# Altium PCB portable_inhaler_test v01 PCB.PcbDoc
Units mm, origin at the board's own origin, x right, y up, seen from the top; angles counter-clockwise.
Board outline 70 x 70 mm, 2 copper layers (Top Layer, Bottom Layer); 21 components, 16 nets, 116 pads, 0 vias.
Unrouted connection lines stored in the file: 47.
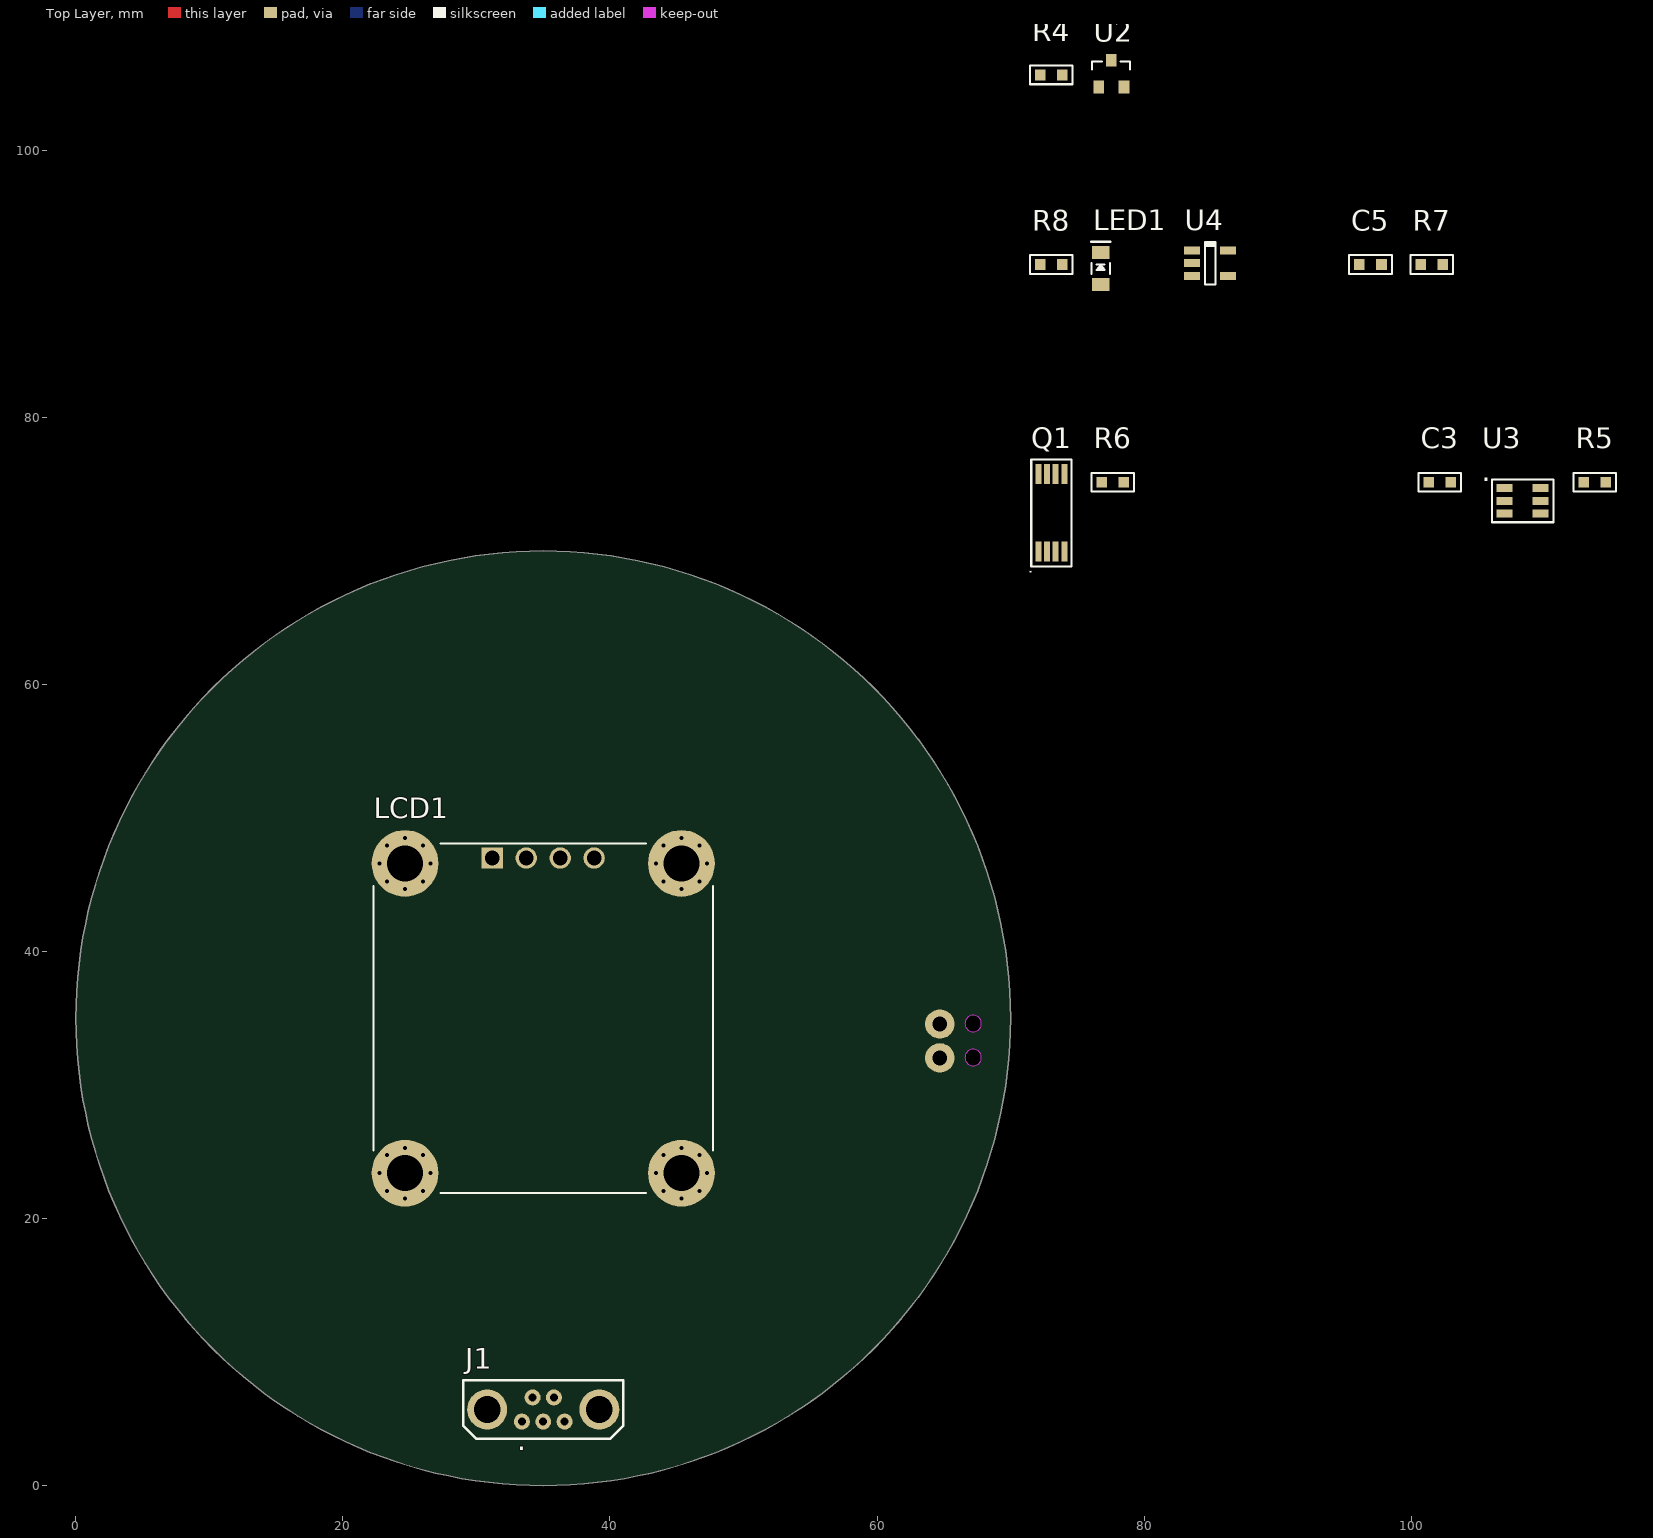
[diagram p0: Top Layer view]
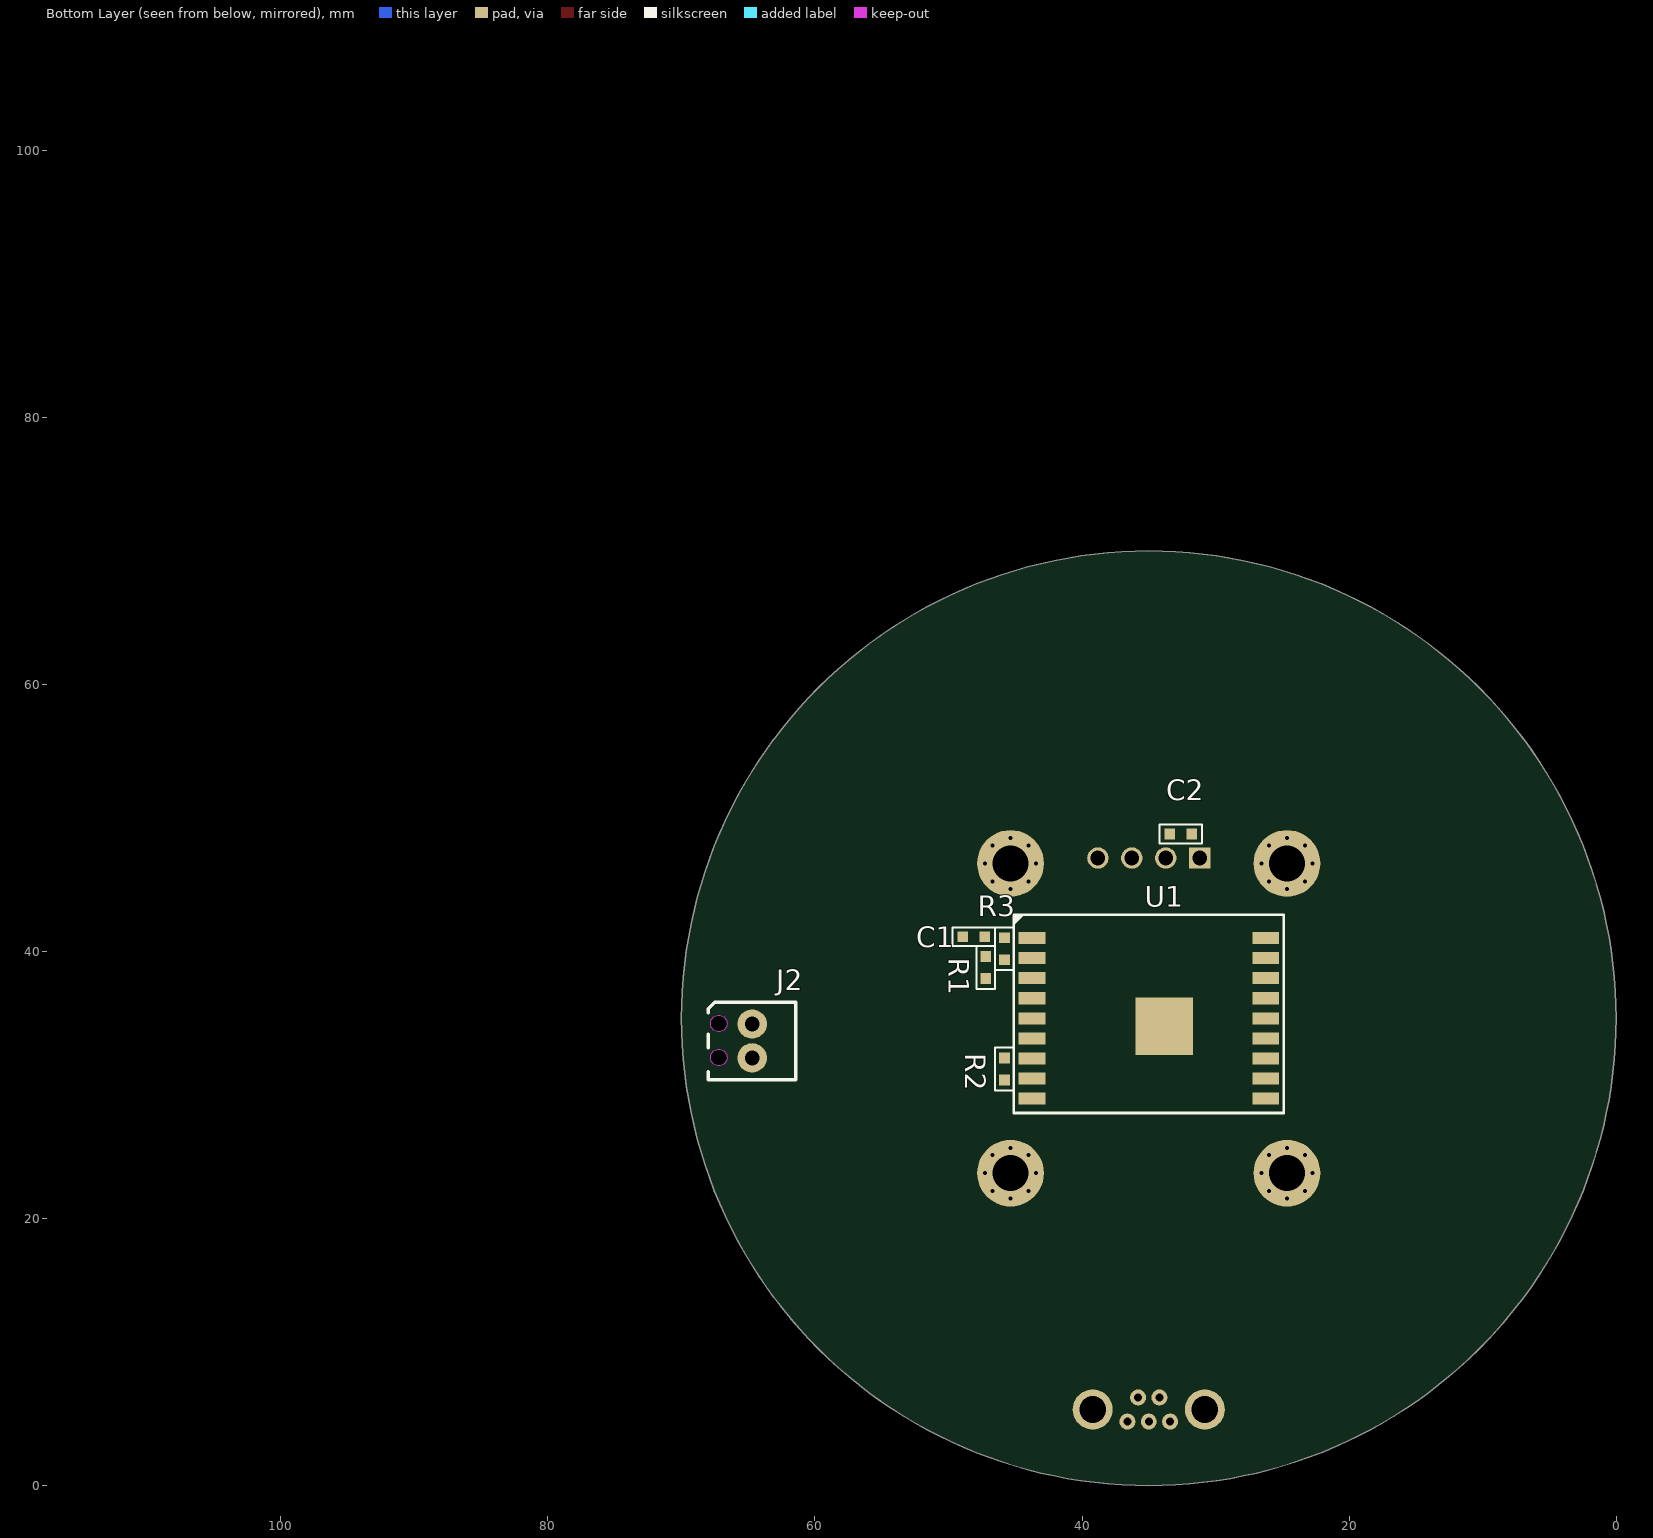
[diagram p1: Bottom Layer view, seen from below]

## Layer stack, top to bottom
Top Solder: solder mask 0.0102, Solder Resist, Dk 3.5
Top Layer: signal copper 0.0356
Dielectric 1: dielectric 0.32, FR-4, Dk 4.8
Bottom Layer: signal copper 0.0356
Bottom Solder: solder mask 0.0102, Solder Resist, Dk 3.5

## Board outline
35,0 cw(c35,35) 0,35 cw(c35,35) 35,70 cw(c35,35) 70,35 cw(c35,35)

## Design rules (kind name [scope] priority, off if disabled: settings)
Clearance [All] p1: gap=0.254 ignorepadtopadclearanceinfootprint=FALSE except(0: Arc-Hole Track-Hole SMDPad-Hole THPad-Hole Via-Hole Fill-Hole Poly-Hole Region-Hole Text-Hole)
PolygonConnect [All] p1: connectstyle=Relief reliefconductorwidth=0.254 reliefentries=4 polygonreliefangle="90 Angle" airgapwidth=0.254
RoomDefinition U_display [InComponentClass('U_display')] p1: confinementstyle=ConfineIn formatcopy=TRUE lockcomponents=FALSE outline 21.75,20.45 48.25,20.45 48.25,50.85 21.75,50.85
RoomDefinition U_MCU [InComponentClass('U_MCU')] p2: confinementstyle=ConfineIn formatcopy=TRUE lockcomponents=FALSE outline 24.45,27.45 48.65,27.45 48.65,43.75 24.45,43.75
RoutingVias [All] p1: holewidth=0.711 width=1.27 viastyle="Through Hole" minholewidth=0.711 minwidth=1.27 maxholewidth=0.711 maxwidth=1.27
SolderMaskExpansion [All] p1: expansion=0.102 istentingtop=FALSE
Width [All] p1: maxlimit=0.254 minlimit=0.254 preferedwidth=0.254
30 further rules are at their usual default settings.

## Classes and differential pairs
component class U_power: R4 U2
component class U_battery: C3 J2 Q1 R5 R6 U3
component class U_battery_charger: C5 J1 LED1 R7 R8 U4
component class U_display: C2 LCD1
component class U_MCU: C1 R1 R2 R3 U1

## Components (designator, comment, footprint, x,y, rotation, side; value= is the part's Value field where it differs from the comment)
C1 "100nF" CAP0603 48.1,41.1 r180 bottom
C2 "100nF" CAP0603 32.6,48.8 r180 bottom
C3 "100nF" CAP0603 102.15,75.15 r0 top
C5 "100nF" CAP0603 96.95,91.45 r0 top
J1 "mini-USB female" L-KLS1-229-5FC 35,5.7 r0 top
J2 "PHOENIX_1725656" PHOENIX_1725656 64.7,33.3 r0 bottom
LCD1 "WEA012864DWPP3N00003" WEA012864DWPP3N00003 35,35 r0 top
LED1 "150080RS75000" LED0805 76.75,91.15 r90 top value=2V
Q1 "FS8205A" TSSOP-8_MOSFET 73.05,72.85 r90 top
R1 "10k" RES0603 47.2,38.8 r90 bottom
R2 "10k" RES0603 45.8,31.2 r270 bottom
R3 "10k" RES0603 45.8,40.2 r90 bottom
R4 "10" RES0603 73.05,105.65 r0 top
R5 "100" RES0603 113.75,75.15 r0 top
R6 "1k" RES0603 77.65,75.15 r0 top
R7 "1k1" RES0603 101.55,91.45 r0 top
R8 "2k2" RES0603 73.05,91.45 r0 top
U1 "ESP-WROOM-02U-N4" ESP-WROOM-02U-N4 35,35 r180 bottom
U2 "MAX809T" SOT-23-3 77.55,105.75 r0 top
U3 "DW01A" SOT-23-6 108.35,73.75 r0 top
U4 "STC4054GR" SOT-23-5 84.95,91.55 r0 top

## Footprints (in the part's own frame and the unit in brackets; to place one, negate y for a bottom-side part, rotate by r counter-clockwise, add the part's x,y. Pads: shape width x height; smd on the part's side, far side on the other; paste and mask are expansions set on the pad)
CAP0603 [mm]
  rect 0.8x0.8 smd: 1(-0.825,0) 2(0.825,0)
  silkscreen extent -1.6,-0.7 1.6,0.7, body extent -0.86,-0.4 0.74,0.4, height 0.8
ESP-WROOM-02U-N4 [mm]
  rect 2x0.9 smd: 1(-8.75,6) 2(-8.75,4.5) 3(-8.75,3) 4(-8.75,1.5) 5(-8.75,0) 6(-8.75,-1.5) 7(-8.75,-3) 8(-8.75,-4.5) 9(-8.75,-6) 10(8.75,-6) 11(8.75,-4.5) 12(8.75,-3) 13(8.75,-1.5) 14(8.75,0) 15(8.75,1.5) 16(8.75,3) 17(8.75,4.5) 18(8.75,6)
  rect 4.3x4.3 smd: 19(1.15,-0.6)
  silkscreen extent -10.1,-7.1 10.1,7.75, body extent -9.03,-6.9 9.04,7.4, height 3.28
L-KLS1-229-5FC [mm]
  round 1.2 hole 0.6: 1(-1.6,-0.9) 2(-0.8,0.9) 3(0,-0.9) 4(0.8,0.9) 5(1.6,-0.9)
  round 3 hole 2: SH(-4.2,0) SH(4.2,0)
  silkscreen extent -6,-2.2 6,2.2, body extent -5.1,-1.98 5.1,1.98, height 9.4
LED0805 [mm]
  rect 1x1.3 smd: A(-1.2,0) C(1.2,0)
  silkscreen extent -0.4,-0.7 2,0.7, body extent -1.01,-0.62 1.01,0.63, height 1.1
PHOENIX_1725656 [mm]
  round 2.2 hole 1.1: 1(0,-1.27) 2(0,1.27)
  Keep-Out Layer board cut-out: 2.5,-1.918 2.264,-1.871 2.063,-1.737 1.929,-1.536 1.882,-1.3 1.882,-1.3 1.929,-1.064 2.063,-0.863 2.264,-0.729 2.5,-0.682 2.5,-0.682 2.736,-0.729 2.937,-0.863 3.071,-1.064 3.118,-1.3 3.118,-1.3 3.071,-1.536 2.937,-1.737 2.736,-1.871 2.5,-1.918
  Keep-Out Layer board cut-out: 2.5,0.622 2.264,0.669 2.063,0.803 1.929,1.004 1.882,1.24 1.882,1.24 1.929,1.476 2.063,1.677 2.264,1.811 2.5,1.858 2.5,1.858 2.736,1.811 2.937,1.677 3.071,1.476 3.118,1.24 3.118,1.24 3.071,1.004 2.937,0.803 2.736,0.669 2.5,0.622
  silkscreen extent -3.25,-2.9 3.3,2.91, body extent -3.1,-2.76 3.1,2.78, height 8.5
RES0603 [mm]
  rect 0.8x0.8 smd: 1(-0.825,0) 2(0.825,0)
  silkscreen extent -1.6,-0.7 1.6,0.7, body extent -0.86,-0.43 0.74,0.43, height 0.48
SOT-23-3 [mm]
  rect 0.8x0.95 smd: 1(-0.95,-1) 2(0.95,-1) 3(0,1)
  silkscreen extent -1.45,0.3 1.4,0.9, body extent -1.5,-1.25 1.5,1.25, height 1.05
SOT-23-5 [mm] "SOT23, 6-Leads, Body 2,90x2,80mm, Pitch 0,95mm, IPC Medium Density"
  rect 1.2x0.6 smd: 1(-1.35,0.95) 2(-1.35,0) 3(-1.35,-0.95) 4(1.35,-0.95) 5(1.35,0.95)
  silkscreen extent -0.4,-1.6 0.4,1.6, body extent -1.25,-1.5 1.25,1.5, height 1.07
SOT-23-6 [mm] "SOT23, 6-Leads, Body 2,90x2,80mm, Pitch 0,95mm, IPC Medium Density"
  rect 1.2x0.6 smd: 1(-1.35,0.95) 2(-1.35,0) 3(-1.35,-0.95) 4(1.35,-0.95) 5(1.35,0) 6(1.35,0.95)
  silkscreen extent -2.3,-1.6 2.3,1.6, body extent -1.24,-1.44 1.16,1.46, height 1
TSSOP-8_MOSFET [mm]
  rect 1.5x0.45 smd mask+0.02: D12(-2.9,0.975) D12(2.9,0.975) G1(-2.9,-0.975) G2(2.9,-0.975) S1(-2.9,-0.325) S1(-2.9,0.325) S2(2.9,-0.325) S2(2.9,0.325)
  silkscreen extent -4,-1.5 4,1.5, body extent -3.12,-1.5 3.16,1.5, height 1.09
WEA012864DWPP3N00003 [mm]
  rect 1.6x1.6 hole 1.1: 1(-3.81,12)
  round 1.6 hole 1.1: 2(-1.27,12) 3(1.27,12) 4(3.81,12)
  round 0.7 hole 0.3 mask+0.102: MH(-12.25,-11.6) MH(-12.25,11.6) MH(-11.694,-12.944) MH(-11.694,-10.256) MH(-11.694,10.256) MH(-11.694,12.944) MH(-10.35,-13.5) MH(-10.35,-9.7) MH(-10.35,9.7) MH(-10.35,13.5) MH(-9.006,-12.944) MH(-9.006,-10.256) MH(-9.006,10.256) MH(-9.006,12.944) MH(-8.45,-11.6) MH(-8.45,11.6) MH(8.45,-11.6) MH(8.45,11.6) MH(9.006,-12.944) MH(9.006,-10.256) MH(9.006,10.256) MH(9.006,12.944) MH(10.35,-13.5) MH(10.35,-9.7) MH(10.35,9.7) MH(10.35,13.5) MH(11.694,-12.944) MH(11.694,-10.256) MH(11.694,10.256) MH(11.694,12.944) MH(12.25,-11.6) MH(12.25,11.6)
  round 5 hole 2.7: MH(-10.35,-11.6) MH(-10.35,11.6) MH(10.35,-11.6) MH(10.35,11.6)
  silkscreen extent -12.7,-13.1 12.7,13.1, body extent -12.7,-13.1 12.7,13.27, height 14.4

## Part data
C1 C2 C3 C5: library part GCM188R71H104KA57J, "Tolerance ±10% / Rated Voltage 50Vdc / Temperature 0±30ppm/℃", Case=0603, Manufacturer="Arrow Electronics", Supplier Part Number 1=81-GCM188R71H104KA7J, Tolerance=10%, Category="Multilayer Ceramic Capacitors - SMD/SMT", HelpURL=http://www.farnell.com/datasheets/4360.pdf?src-supplier=Element14, Item="100nF 50V  ±10%", Part Number=GCM188R71H104KA57J, Supplier 1=Mouser, Vdc=50V
J1: library part L-KLS1-229-5FC, "USB Connectors MINI USB B", Case=Female, Manufacturer=KLS, Supplier Part Number 1=07959, Category="USB Connectors", HelpURL=https://belchip.by/sitedocs/00007959.pdf, Item="USB Mini B", Part Number=L-KLS1-229-5FC, Supplier 1=Belcip
J2: library part 1725656, "Fixed Terminal Blocks 2P 2.54mm 90DEG", Case=Female, Manufacturer="Phoenix Contact", HelpURL=https://eu.mouser.com/datasheet/2/324/4/1725656-1437410.pdf, Item=PHOENIX_1725656, Part Number=1725656, Supplier 1=Mouser
LCD1: "OLED 0.96\" display, 128x64, white,  IC SSD1306BZ, I2C, 3v, -40...+80°С", Case=none, Manufacturer=Winstar, Supplier Part Number 1=8001808254, Category="OLED displays", HelpURL=https://www.compel.ru/item-pdf/bf9bb7bf1ce7223b4efcb84e5467b96d/pn/winstar~wea012864dwpp3n00003.pdf, Item=WEA012864DWPP3N00003, Part Number=WEA012864DWPP3N00003, Supplier 1=ChipDip
LED1: "Standard LEDs - SMD WL-SMCW SMDMono TpVw Waterclr 0805 Red", Case=0805, Color=Red, Manufacturer="Wurth Elektronik", Supplier Part Number 1=710-150080RS75000, Category="Standard LEDs - SMD", HelpURL=https://eu.mouser.com/datasheet/2/445/150080VS75000-3085206.pdf, Imax="20 mA", Item=150080RS75000, Part Number=150080RS75000, Supplier 1=Mouser
Q1: "Dual N-Channel Enhancement Mode Power MOSFET", Case=TSSOP-8, Manufacturer="Fortune Semiconductor", Category=MOSFET, Channel=N-Channel, ComponentLink1Description=HelpURL, ComponentLink1URL=https://www.vishay.com/docs/76933/sisf02dn.pdf, FET Type="2 N-Channel (Dual) Common Drain", HelpURL=https://www.ic-fortune.com/upload/Download/FS8205A-DS-12_EN.pdf, Id=6A, Item=FS8205A, Part Number=FS8205A, Supplier 1=Chip-Dip, Supplier Part Number 1=FS8205A, Vds=20V
R1 R2 R3: library part CR0603-FX-1002ELF, "Tolerance ±1% / Power (Watts) 0.1W, 1/10W / Temperature Coefficient ±100ppm/°C", Case=0603, Manufacturer=Bourns, Supplier Part Number 1=652-CR0603FX-1002ELF, Tolerance=1%, Category="Thin Film Resistors - SMD", HelpURL=https://eu.mouser.com/datasheet/2/54/cr-1858361.pdf, Item="10k  ±1% 0.1W", Part Number=CR0603-FX-1002ELF, Supplier 1=Mouser
R4: library part RC0603FR-0710RL, "Tolerance ±1% / Power (Watts) 0.1W, 1/10W / Temperature Coefficient ±100ppm/°C", Case=0603, Manufacturer=YAGEO, Supplier Part Number 1=603-RC0603FR-0710RL, Tolerance=1%, Category="Thin Film Resistors - SMD", HelpURL=https://www.mouser.com/datasheet/2/447/PYu_RC_Group_51_RoHS_L_11-1984063.pdf, Item="10 ±1% 0.1W", Part Number=RC0603FR-0710RL, Supplier 1=Mouser
R5: library part 652-CR0603AFX1000ELF, "Tolerance ±1% / Power (Watts) 0.1W, 1/10W / Temperature Coefficient ±100ppm/°C", Case=0603, Manufacturer=Bourns, Tolerance=0.01, Category="Thin Film Resistors - SMD", HelpURL=https://eu.mouser.com/datasheet/2/427/VISH_S_A0003599164_1-2569050.pdf, Item="100  ±1% 0.1W", Part Number=652-CR0603AFX1000ELF, Supplier 1=Mouser
R6: library part CRT0603-FY-1001ELF, "Tolerance ±1% / Power (Watts) 0.1W, 1/10W / Temperature Coefficient ±25ppm/°C", Case=0603, Manufacturer=Bourns, Supplier Part Number 1=652-CRT0603FY1001ELF, Tolerance=0.01, Category="Thin Film Resistors - SMD", HelpURL=https://eu.mouser.com/datasheet/2/54/CRT-1649066.pdf, Item="1k ±1% 0.1W", Part Number=CRT0603-FY-1001ELF, Supplier 1=Mouser
R7: library part ERJ-3EKF1101V, "Tolerance ±1% / Power (Watts) 0.1W, 1/10W / Temperature Coefficient ±100ppm/°C", Case=0603, Manufacturer=Panasonic, Supplier Part Number 1=667-ERJ-3EKF1101V, Tolerance=1%, Category="Thin Film Resistors - SMD", HelpURL=https://eu.mouser.com/datasheet/2/315/AOA0000C304-1149620.pdf, Item="1k1  ±1% 0.1W", Part Number=ERJ-3EKF1101V, Supplier 1=Mouser
R8: library part 541-2.20KHCT-ND, "Tolerance ±1% / Power (Watts) 0.1W, 1/10W / Temperature Coefficient ±100ppm/°C", Case=0603, Manufacturer="Vishay Dale", Tolerance=1%, Category="Thin Film Resistors - SMD", HelpURL=http://www.farnell.com/datasheets/2111203.pdf?src-supplier=Element14, Item="2k2 ±1% 0.1W", Part Number=541-2.20KHCT-ND, Supplier 1=Digi-Key
U1: "ESP-WROOM-02U-N4, WiFi Modules - 802.11 SMD Module, ESP8266EX, 32Mbits SPI flash, UART Mode, U.FL antenna connector", Manufacturer="Espressif Systems", Supplier Part Number 1=8004788563, Category="WiFi Modules - 802.11", HelpURL=https://www.espressif.com/sites/default/files/documentation/esp-wroom-02u_esp-wroom-02d_datasheet_en.pdf, Interfaces="GPIO, HSPI, I2C, I2S. IR, PWM, UART", Item=ESP-WROOM-02U-N4, Part Number=ESP-WROOM-02U-N4, Supplier 1=Chipdip, Vdss=3.3V
U2: "Power monitor 3.08В SOT23-3", Case=SOT-23, Manufacturer=UMW, Supplier Part Number 1=9001067621, Category="Supervisory Circuits", HelpURL=https://static.chipdip.ru/lib/848/DOC018848681.pdf, Item=MAX809T, Part Number=MAX809T, Supplier 1=ChipDip
U3: "Battery Management Battery Protection IC", Case=SOT-23-6, Manufacturer="H&M Semiconductor", Category="Battery Management", HelpURL=https://hmsemi.com/downfile/DW01A.PDF, Item=DW01A, Part Number=DW01A, Supplier 1=Chip-Dip, Supplier Part Number 1=DW01A
U4: "800mA Standalone linear Li-Ion / Battery charger with thermal regulation", Case=TSOT-23-5, Manufacturer=STMicroelectronics, Supplier Part Number 1=9000208263, Category="Battery Management", HelpURL=https://static.chipdip.ru/lib/264/DOC029264196.pdf, Item=STC4054GR, Part Number=STC4054GR, Supplier 1=ChipDip

## Nets (pads, with @x,y where several pads share a name; then routed paths per layer and width w, separated by ;. In a path a pad name is that pad's centre, name@x,y a point inside that pad or via, vN(x,y) a via of type N, cw(c..) or ccw(c..) an arc to the next point about the centre after c; other vN are vias at no path point)
3V3: C1.2 C2.2 LCD1.1 R1.2 R2.2 R3.2 R4.1 U1.1
GND: C1.1 C2.1 C5.1 J1.5 J1.SH LCD1.2 Q1.S2 R6.1 R8.1 U1.9 U1.13 U1.18 U1.19 U2.1 U4.2
NetC3_1: C3.1 J2.2 Q1.S1 U3.6
NetC3_2: C3.2 R5.1 U3.5
NetC5_2: C5.2 J1.1 R7.2 U4.4
NetJ2_1: J2.1 R5.2 U4.3
NetLED1_A: LED1.A R7.1
NetLED1_C: LED1.C U4.1
NetQ1_G1: Q1.G1 U3.1
NetQ1_G2: Q1.G2 U3.3
NetR3_1: R3.1 U1.2 U2.2
NetR4_2: R4.2 U2.3
NetR6_2: R6.2 U3.2
NetR8_2: R8.2 U4.5
SCL: LCD1.3 R1.1 U1.3
SDA: LCD1.4 R2.1 U1.7
pads on no net: J1.2 J1.3 J1.4 LCD1.MH Q1.D12 U1.4 U1.5 U1.6 U1.8 U1.10 U1.11 U1.12 U1.14 U1.15 U1.16 U1.17 U3.4

## Silkscreen, mask and mechanical layers (free items; w line width, h text height)
Mechanical 1:
  lines w0.254: 0,0 35,0 35,35 0,35 0,0
Board:
  circle w0.1: c35,35 r35